# Altium PCB Thrust Stand + Wind Tunnel Controller.PcbDoc (part 2 of 2)
Units mm, origin at the board's own origin, x right, y up, seen from the top; angles counter-clockwise.
Board outline 72 x 57 mm, 4 copper layers (Top Layer, Layer 2 (GND), Layer 3 (GND/POW), Bottom Layer (SIG)), stack 0.346 mm thick; 155 components, 74 nets, 570 pads, 498 vias.
Unrouted connection lines stored in the file: 154.
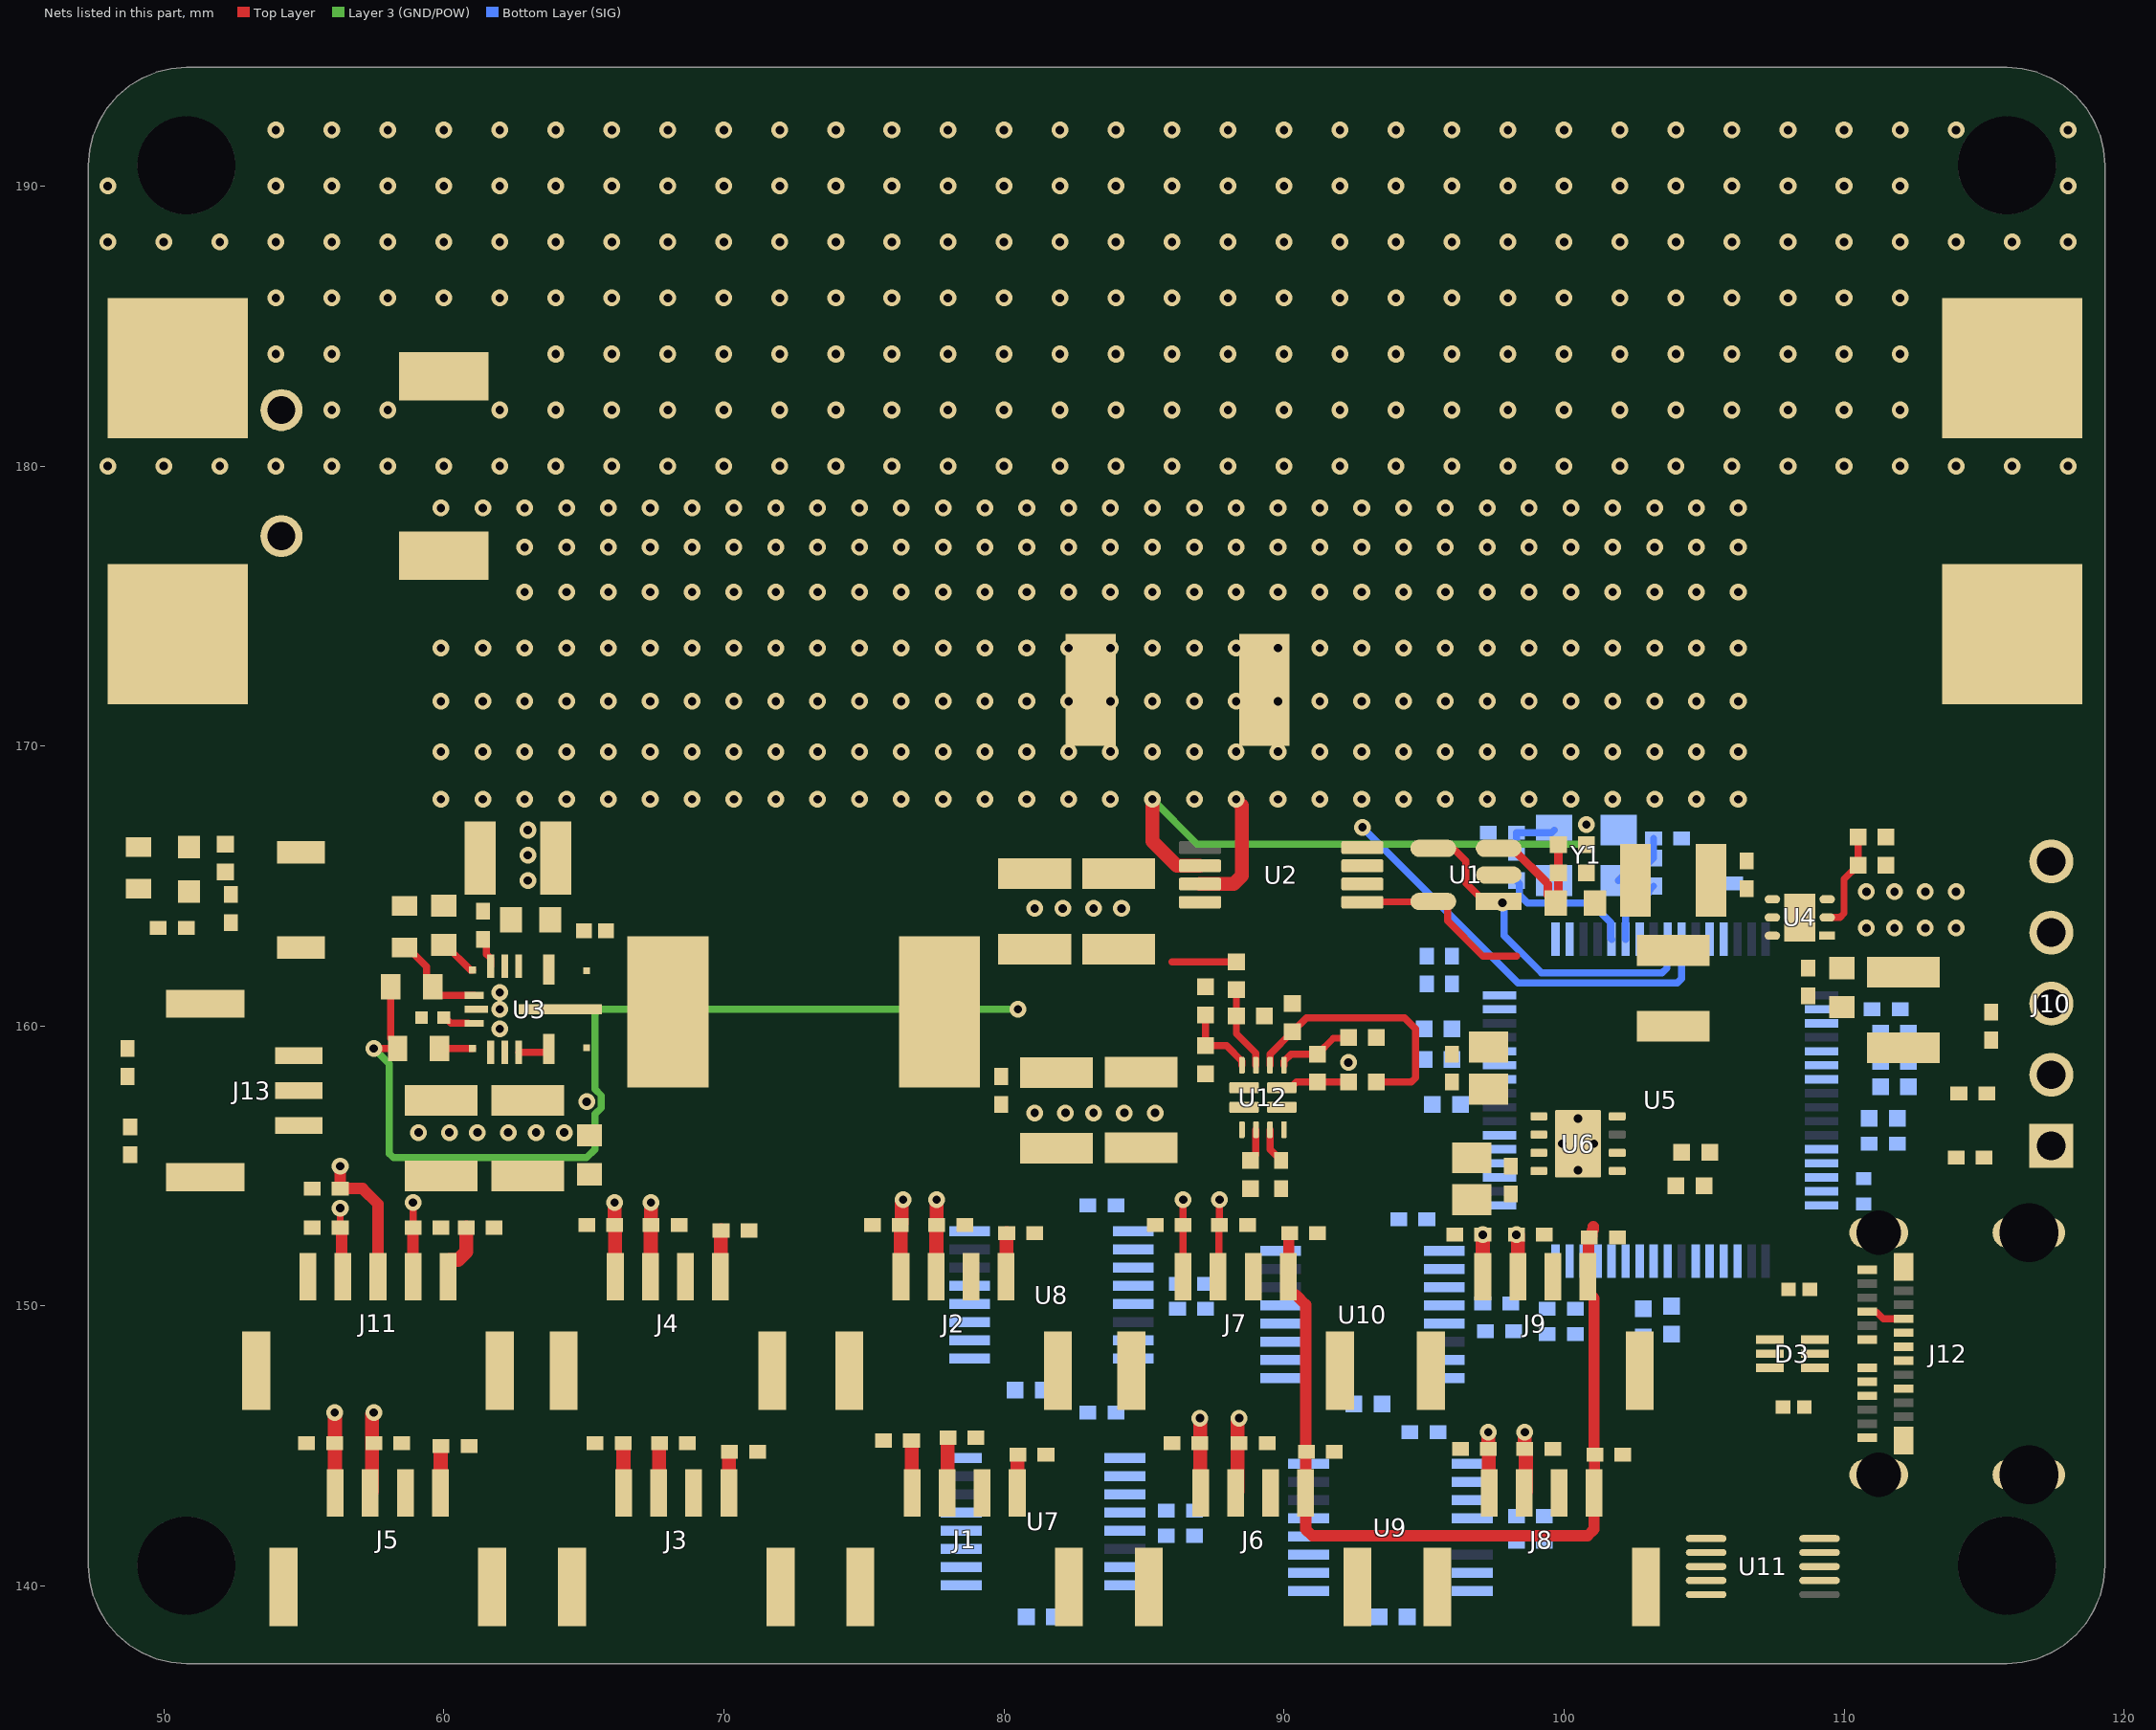
[diagram p4: the nets of this part, all layers, seen from the top]

## Part data
C1 C35 C36 C37 C38 C39 C40 C41 C42 C43 C44 C45 C46 C47 C48 C50 C51 C52 C53 C54 C55 C56 C57 C58 C59 C60 C61 C64 C65 C66 C67 C68 C69 C70 C71 C72 C73: "Capacitor (Semiconductor SIM Model)", LatestRevisionDate=29-May-2009, LatestRevisionNote="IPC-7351 Footprint Added.", PackageDescription="Chip Capacitor", PackageReference=C1206, Published=8-Jun-2000, Publisher="Altium Limited"
C4 C5 C6 C7 C9 C10 C11 C12 C13 C14 C15 C16 C17 C18 C19 C20 C21 C22 C31 C62: library part "Cap Semi", "Capacitor (Semiconductor SIM Model)", LatestRevisionDate=29-May-2009, LatestRevisionNote="IPC-7351 Footprint Added.", PackageDescription="Chip Capacitor", PackageReference=C1206, Published=8-Jun-2000, Publisher="Altium Limited"
C8: library part CMP-2000-06331-1, "Chip Capacitor, 0.1 uF, +/- 10%, 10 V, -55 to 125 degC, 0402 (1005 Metric), RoHS, Tape and Reel", Capacitance=100nF, Case Size/Dimension=0402, Dielectric=X7R, Manufacturer=Murata, Package Description="2-Pin Surface Mount Device, Body 1 x 0.5 mm", Rated Voltage=10V, Tolerance (%)=±10%, Datasheet URL=http://search.murata.co.jp/Ceramy/image/img/A01X/G101/ENG/GRM155R71A104KA01-01.pdf, Datasheet Version=02/2016, Manufacturer URL=http://www.murata.com/, Mounting Technology=SurfaceMount, Package Reference=0402
C63: library part CMP-002-000000-4, "Generic CAP 0402", Design Item ID="Generic CAP 0402", Source=Schlib1.SchLib
D1: library part CMP-02577-000023-1, "TVS DIODE 25.6VWM 41.4VC SMC"
D2: library part CMP-1426-00006-8, "LED Uni-Color Green 572nm 2-Pin Chip 0603(1608Metric) T/R", Case Code (Imperial)=0603, Case Code (Metric)=1608, Color=Green, Forward Current=100mA, Forward Voltage=2V, Manufacturer Lifecycle Status=ACTIVE, Max Junction Temperature (Tj)=95°C, Max Operating Temperature=85°C, Max Reverse Voltage (DC)=5V, Min Operating Temperature=-40°C, Power Dissipation=72mW, Test Current=20mA, Case/Package=0603, Dominant Wavelength=570nm, Height=700µm, Length=1.6mm, Lens Style="Clear, Rectangular", Lifecycle Status=Production, Luminous Intensity=40mcd, Mount="Surface Mount", Number of Pins=2, Packaging="Tape and Reel", Peak Wavelength=572nm, REACH SVHC=Unknown, Reverse Voltage=5V, RoHS=Compliant, Viewing Angle=140°, Wavelength=570nm, Width=800µm, YEOL="1 = Estimated lifetime > 10 years"
D3: library part CMP-12225-000058-1, "TVS DIODE 5.25V 17V SOT666", Breakdown Voltage=6V, Capacitance=3.5pF, Case/Package=SOT-666, Clamping Voltage=17V, Leakage Current=150nA, Max Operating Temperature=125°C, Min Operating Temperature=-40°C, Operating Supply Voltage=5V, Package Quantity=1, Peak Pulse Current=5A, Power Line Protection=Yes, Test Current=1mA, Contact Plating=Tin, Depth=1.3mm, Direction=Unidirectional, Element Configuration=Dual, ESD Protection=Yes, Height=0.6mm, Lead Free="Lead Free", Length=1.7mm, Max Breakdown Voltage=6V, Max Reverse Leakage Current=150nA, Min Breakdown Voltage=6V, Mount="Surface Mount", Number of Bidirectional Channels=2, Number of Channels=2, Number of Elements=1, Number of Pins=6, Packaging="Tape and Reel", Polarity=Unidirectional, Radiation Hardening=No, REACH SVHC="No SVHC", Reverse Breakdown Voltage=6V, Reverse Standoff Voltage=5V, Termination=SMD/SMT, Width=1.3mm, Working Voltage=5V
D4 D5 D6 D7 D8 D9 D10 D11 D12 D13 D14 D15 D16 D17 D18 D19 D20 D21: library part CMP-04989-000001-1, "HDMI2.0 ESD PROTECTION", Ambient Temperature Range High=+125°C, Ambient Temperature Range Low=-40°C, Breakdown Voltage=4.5V, Capacitance=0.9pF, Clamping Voltage=6.8V, Manufacturer="Texas Instruments", Package=DPY0002A, Peak Pulse Current=6A, Peak Pulse Power=40W, Reverse Standoff Voltage=3.6V, Temperature="-40°C to +125°C", Automotive=No, Category=Diode, ComponentLink2Description=Datasheet, ComponentLink2URL=http://www.ti.com/lit/ds/symlink/esd321.pdf, Device Class L1="Circuit Protection", Device Class L2="TVS Diodes", Device Class L3=unset, Digikey Description="HDMI2.0 ESD PROTECTION", Direction=Unidirectional, Height=0.45mm, Lead Free=Yes, Manufacturer Part Number=ESD321DPYR, Number of Channels=1, Octopart=https://octopart.com/esd321dpyr-texas+instruments-94354200, RoHS=TRUE, Standoff Height=0mm, Temperature Range High=+125°C, Temperature Range Low=-40°C
D22 D23 D24 D25 D26 D27 D28 D29: library part CMP-04989-000001-1, "TVS DIODE 5VWM 9.2VC 0402/2DFN", Ambient Temperature Range High=+125°C, Ambient Temperature Range Low=-40°C, Breakdown Voltage=4.5V, Capacitance=0.9pF, Clamping Voltage=6.8V, Manufacturer="Texas Instruments", Manufacturer Part Number=ESD321DPYR, Package=DPY0002A, Peak Pulse Current=6A, Peak Pulse Power=40W, Reverse Standoff Voltage=3.6V, Temperature="-40°C to +125°C", Automotive=No, Category=Diode, ComponentLink2Description=Datasheet, ComponentLink2URL=http://www.ti.com/lit/ds/symlink/esd321.pdf, Device Class L1="Circuit Protection", Device Class L2="TVS Diodes", Device Class L3=unset, Digikey Description="HDMI2.0 ESD PROTECTION", Direction=Unidirectional, Height=0.45mm, Lead Free=Yes, Number of Channels=1, Octopart=https://octopart.com/esd321dpyr-texas+instruments-94354200, RoHS=TRUE, Standoff Height=0mm, Temperature Range High=+125°C, Temperature Range Low=-40°C
J1 J2 J3 J4 J5 J6 J7 J8 J9: library part CMP-17439-000062-2, "CONN HEADER SMD 4POS 1.25MM", Case/Package=SMD/SMT, Current rating=1A, Housing Color=Natural, Max Operating Temperature=85°C, Min Operating Temperature=-25°C, Voltage rating=50V, Contact Material=Bronze, Contact Plating=Tin, Gender=Male, Housing Material=Nylon, Lead Free="Lead Free", Number of Contacts=4, Number of Positions=4, Number of Rows=4, Orientation=Straight, Packaging="Cut Tape", Pitch=1.25mm, REACH SVHC="No SVHC", Series=GH, Termination=Crimp, Voltage Rating (AC)=50V, Wire/Cable Gauge=26AWG
J10: library part CMP-02766-000105-1, "CONN HEADER VERT 5POS 2.54MM", Contact Material=Bronze, Contact Plating=Gold, Gender=Male, Mount="Through Hole", Number of Contacts=5, Number of Rows=1, REACH SVHC="No SVHC", Termination="Through Hole"
J11: library part CMP-17439-000467-1, "CONN HEADER SMD 5POS 1.25MM", Color=Natural, Flammability Rating="UL94 V-0", Max Operating Temperature=85°C, Min Operating Temperature=-25°C, Voltage rating=50V, Connector Type=Header, Contact Finish - Mating=TIN, Contact Material=Bronze, Contact Plating=Tin, Contact Shape=Rectangular, Contact Type="Outer Shroud Contact", Fastening Type=Ramp, Insulation Color=Natural, Insulation Material=Nylon, Lead Free="Lead Free", Mated Stacking Heights=7.3mm, Mount="Surface Mount", Number of Pins=5, Number of Positions=5, Number of Rows=1, Packaging="Cut Tape", Pitch=0.049inch, Series=GH, Termination=Solder
J12: library part CMP-04767-000004-1, "CONN RCP USB3.1 TYPEC 24P SMD RA", Current rating=0.25/1.25/5A, Manufacturer=Molex, Package=0, Temperature="-30°C to +85°C", Temperature Range High=+85°C, Temperature Range Low=-30°C, Voltage rating=30V, Automotive=No, Category=Conn, ComponentLink2Description=Datasheet, ComponentLink2URL=https://www.molex.com/webdocs/datasheets/pdf/en-us/1054500101_IO_CONNECTORS.pdf, Conn Orientation="Right Angle", Contact Material=Gold,Nickel, Device Class L1=Connectors, Device Class L2="USB Connectors", Device Class L3=unset, Digikey Description="CONN RCP USB3.1 TYPEC 24P SMD RA", Footprint Url=https://www.molex.com/pdm_docs/sd/1054500101_sd.pdf, Height=3.44mm, Is Female=yes, Lead Free=Yes, Manufacturer Part Number=1054500101, Mouser Description="USB Shielded I/O Receptacle; Type C; Right Angle; Surface Mount; Gold over Nickel", Number of Contacts=24, Octopart=https://octopart.com/105450-0101-molex-68082325, Pitch=0.5mm, RoHS=TRUE, Shielding=true, Usb Standard="USB 3.1"
J13: library part CMP-17439-000616-1, "CONN HEADER SMD 3POS 1.25MM", Color=Natural, Flammability Rating="UL94 V-0", Max Operating Temperature=85°C, Min Operating Temperature=-25°C, Voltage rating=50V, Connector Type=Header, Contact Finish - Mating=TIN, Contact Material=Bronze, Contact Plating=Tin, Contact Shape=Rectangular, Contact Type="Outer Shroud Contact", Fastening Type=Ramp, Insulation Color=Natural, Insulation Material=Nylon, Lead Free="Lead Free", Mated Stacking Heights=7.3mm, Mount="Surface Mount", Number of Positions=3, Number of Rows=1, Packaging="Cut Tape", Pitch=0.049inch, Series=GH, Termination=Solder
L1: library part CMP-2000-07146-2, "FIXED IND 15UH 5A 27 MOHM SMD", Case/Package=1260, Current rating=5A, DC Resistance (DCR)=27mR, Frequency=17.6MHz, Inductance=15uH, Inductance Tolerance=20%, Max Operating Temperature=125°C, Min Operating Temperature=-40°C, Package Quantity=600, Resistance=27MR, Resistor Type=Wirewound, Saturation Current=4.6A, Test Frequency=100kHz, Core Material=Ferrite, DC Current=5A, Depth=12.8mm, Height=6mm, Height - Seated (Max)=0.256inch, Length=12.5mm, Material=Steel, Max DC Current=5A, Military Standard=Not, Mount="Surface Mount", Number of Pins=2, Packaging="Tape and Reel", Q Factor=25, REACH SVHC="No SVHC", RMS Current (Irms)=5A, RoHS Compliant=Yes, Sample Rate (Hz)=100kHz, Self Resonant Frequency=17.6MHz, Series=SRR1260, Shielding=Shielded, Termination=SMD/SMT, Tolerance=20%, Width=12.5mm
R1 R2 R5 R6 R7 R9 R10 R11 R12 R13 R14 R15 R16 R17 R18 R24 R25 R26 R27 R28 R29 R30 R31 R32 R36 R37 R38 R39 R40 R41 R43: "Semiconductor Resistor", LatestRevisionDate=17-Jul-2002, LatestRevisionNote="Re-released for DXP Platform.", PackageReference=AXIAL-0.5, Published=8-Jun-2000, Publisher="Altium Limited"
R3: library part CMP-03412-007688-1, "RES 0.001 OHM 1% 5W 2512", Manufacturer=Yageo, Manufacturer Part Number=AC2512JK-072K4L, Package=AC2512, Power rating=1W, Resistance=1mΩ, Temperature="-55°C to +155°C", Temperature Range High=+155°C, Temperature Range Low=-55°C, Tolerance=0.05, Voltage rating=200V, Automotive=Yes, Automotive Grade="Grade 0", Category=Res, ComponentLink2Description=Datasheet, ComponentLink2URL=http://www.yageo.com/documents/recent/PYu-AC_51_RoHS_L_6.pdf, Composition="Thick Film", Device Class L1="Passive Components", Device Class L2=Resistors, Device Class L3="Chip SMD Resistors", Digikey Description="RES SMD 2.4K OHM 5% 1W 2512", Footprint Url=http://www.yageo.com/exep/pages/download/literatures/PYu-R_Mount_10.pdf, Height=0.65mm, Ipc Land Pattern Name=RESC635310X55, Lead Free=Yes, Octopart=https://octopart.com/ac2512jk-072k4l-yageo-71370358, RoHS=TRUE, Series=AC
R4: library part CMP-2002-00086-1, Manufacturer="Vishay Dale", Resistance=52.3k, Part Number=CRCW040252K3FKED
R19 R20: library part CMP-12256-000001-1, "RES 5.1 kohm, 62.5 mW, 1%, 50 V", Ambient Temperature Range High=+125°C, Ambient Temperature Range Low=-55°C, Manufacturer="Multicomp Pro", Package=MCWR04, Power rating=62.5mW, Resistance=5.1kΩ, Temperature coefficient=100ppm/°C, Tolerance=1%, Voltage rating=50V, Automotive=No, Category=Res, ComponentLink2Description=Datasheet, ComponentLink2URL=http://www.farnell.com/datasheets/2860681.pdf, Composition="Thick Film", Device Class L1="Passive Components", Device Class L2=Resistors, Device Class L3="Chip SMD Resistors", Height=0.4mm, Ipc Land Pattern Name=RESC10050X35, Lead Free=Yes, Manufacturer Part Number=MCWR04X5101FTL, Octopart=https://octopart.com/mcwr04x5101ftl-multicomp-50550258, RoHS=TRUE, Series=MCWR
R42 R44 R45 R46: "Semiconductor Resistor 1%", LatestRevisionDate=17-Jul-2002, LatestRevisionNote="Re-released for DXP Platform.", PackageReference=AXIAL-0.5, Published=8-Jun-2000, Publisher="Altium Limited"
SW1: library part CMP-2100-03586-2, "SWITCH TACTILE SPST-NO 0.05A 12V", Contact Current Rating=50mA, Contact Resistance=100mR, Insulation Resistance=100MR, Max Operating Temperature=70°C, Max Voltage Rating (DC)=12V, Min Operating Temperature=-25°C, Operating Force=1.5N, Package Quantity=1, Ratings="Dust Proof", Actuator Length=0.4mm, Actuator Type=Standard, Contact Material=Silver, Current rating=50mA, Depth=2.5mm, Electrical Life=200000Cycles, Height=1.2mm, Illumination Type=Non-Illuminated, Lead Free="Lead Free", Length=4mm, Max Current Rating=50mA, Mechanical Life=200000Cycles, Mount="Surface Mount", Orientation=Straight, Packaging="Tape and Reel", Switch Function=Off-Mom, Switch Travel=0.15mm, Termination=SMD/SMT, Throw Configuration=SPST, Voltage Rating (DC)=12V, Weight=0.000776oz, Width=3mm
U1: library part CMP-0187-00462-3, "IC OPAMP GP 1 CIRCUIT SOT23-5", Case/Package=SOT-23, Input Bias Current=1pA, Input Offset Voltage (Vos)=4.5mV, Max Operating Temperature=85°C, Max Supply Voltage=6V, Min Operating Temperature=-40°C, Min Supply Voltage=1.8V, Nominal Supply Current=100uA, Operating Supply Voltage=5.5V, Output Current=23mA, Package Quantity=1, Power Supply Rejection Ratio (PSRR)=86dB, Voltage Gain=112dB, Bandwidth=1MHz, Common Mode Rejection Ratio=60dB, Contact Plating=Tin, Gain Bandwidth Product=1MHz, Height=1.3mm, Lead Free="Lead Free", Length=3.1mm, Mount="Surface Mount", Number of Amplifiers=1, Number of Channels=1, Number of Circuits=1, Number of Elements=1, Number of Pins=5, Operating Supply Current=100uA, Output Current per Channel=23mA, Packaging="Tape and Reel", Radiation Hardening=No, REACH SVHC="No SVHC", Slew Rate=0.6V/µs, Unity Gain Bandwidth Product=1MHz, Voltage=6V, Width=1.8mm
U2: library part CMP-04895-000047-1, "IC AMP CURRENT SENSE 8-TSSOP", Ambient Temperature Range High=+125°C, Ambient Temperature Range Low=-40°C, Input Bias Current=90uA, Input Offset Voltage=0.005mV, Manufacturer="Texas Instruments", Max Junction Temp=+150°C, Max Supply Voltage=5.5V, Min Supply Voltage=2.7V, Nominal Supply Current=1.8mA, Package=PW0008A, Temperature="-40°C to +125°C", Voltage Gain=0.05V/mV, Automotive=No, Bandwidth=400kHz, Category=IC, ComponentLink2Description=Datasheet, ComponentLink2URL=http://www.ti.com/lit/ds/symlink/ina240.pdf, Device Class L1="Integrated Circuits (ICs)", Device Class L2="Linear ICs", Device Class L3=Instrumentation, Digikey Description="IC AMP CURRENT SENSE 8-TSSOP", Height=1.2mm, Ipc Land Pattern Name=SOP65P300X120-8, Lead Free=Yes, Manufacturer Part Number=INA240A2PWR, Number of Channels=1, Octopart=https://octopart.com/ina240a2pwr-texas+instruments-75431049, RoHS=TRUE, Standoff Height=0.05mm, Temperature Range High=+125°C, Temperature Range Low=-40°C
U3: "8-A buck converter optimized for power density and low EMI 16-VQFN-HR -40 to 150", Manufacturer_Name="Texas Instruments", Copyright="Copyright (C) 2026 Ultra Librarian. All rights reserved.", Manufacturer_Part_Number=LM61480RPHR, RefDes=RefDes, Type=TYPE
U4: library part CMP-04917-000172-1, "IC REG LINEAR POS ADJ 1A 6WSON"
U5: library part CMP-12105-000007-1, "IC MCU 32BIT 512KB FLASH 64LQFP", Ambient Temperature Range High=+85°C, Ambient Temperature Range Low=-40°C, Frequency=180MHz, Manufacturer=ST, Max Junction Temp=+105°C, Max Supply Voltage=3.6V, Min Supply Voltage=1.7V, Package=LQFP64-5W, Temperature="-40°C to +105°C", Automotive=No, Category=IC, ComponentLink2Description=Datasheet, ComponentLink2URL=https://www.st.com/en/microcontrollers-microprocessors/stm32f446re.html, Core Architecture="ARM Cortex-M4", Data Bus Width=32bits, Device Class L1="Integrated Circuits (ICs)", Device Class L2="Embedded Processors and Controllers", Device Class L3=Microcontrollers, Digikey Description="IC MCU 32BIT 512KB FLASH 64LQFP", Height=1.6mm, Interface=I2C,SPI,UART,USART,CAN,USB,LIN,IrDA,I2S,Other, Ipc Land Pattern Name=QFP50P1200X1200X160-64, Lead Free=Yes, Manufacturer Part Number=STM32F446RET6, Memory Size=512KBytes, Memory Type=FLASH, Mouser Description="ARM Microcontrollers - MCU High-performance and DSP with FP, ARM Cortex-M4 MCU with 512 Kbytes Flash, 180 MHz CPU, Art Accelerator, SDRAM", Number of A/D Converters=3, Number Of Adc Channels=16, Number Of Cores=1, Number Of I2C Channels=4, Number of I/Os=50, Number Of Pwm Channels=32, Number Of Spi Channels=4, Number of Timers/Counters=14, Number Of Uart Channels=6, Number Of Usb Channels=2, Octopart=https://octopart.com/stm32f446ret6-stmicroelectronics-52642920, RAM Size=128KBytes, RoHS=TRUE, Standoff Height=0.05mm, Temperature Range High=+105°C, Temperature Range Low=-40°C
U6: library part CMP-0395-00646-2, "Single Output High PSRR LDO, 500 mA, Adjustable 1.2 to 5.5 V Output, 2.7 to 5.5 V Input, 8-pin SON (DRB), -40 to 125 degC, Green (RoHS & no Sb/Br)", Manufacturer="Texas Instruments", Rating=Automotive, Accuracy(%)=2, ComponentLink1Description="Manufacturer URL", ComponentLink1URL=http://www.ti.com/, ComponentLink2Description=Datasheet, ComponentLink2URL=http://www.ti.com/general/docs/lit/getliterature.tsp?genericPartNumber=TPS79501-Q1&fileType=pdf, ComponentLink3Description="Package Specification", ComponentLink3URL=http://www.ti.com/litv/pdf/mpds118h, DatasheetVersion=SLVSAJ9, Eco-Plan="Green (RoHS & no Sb/Br)", Iout(Max)(A)=0.5, Iq(Typ)(mA)=0.26, Mounting Technology="Surface Mount", PackageDescription="8-Pin Plastic Small Outline, Body 3 x 3 mm, Pitch 0.65 mm", PackageReference=DRB0008B, PackageVersion=4203482-2/K, PartNumber=TPS79501QDRBRQ1, SubFamily="Single Channel LDO", Vdo(Typ)(mV)=110, Vin(Max)(V)=5.5, Vin(Min)(V)=2.7, Vout Adj(Max)(V)=5.5, Vout Adj(Min)(V)=1.2
U7 U8 U9 U10: "24-bit, 2-kSPS, four-channel, low-power, delta-sigma ADC with PGA, VREF, SPI and two IDACs 16-TSSOP -40 to 125", Manufacturer_Name="Texas Instruments", Copyright="Copyright (C) 2025 Ultra Librarian. All rights reserved.", Manufacturer_Part_Number=ADS1220IPW, RefDes=RefDes, Type=Type
U11: library part CMP-010-000001-1, Design Item ID=CH340E, Source=Schlib1.SchLib
U12: library part CMP-04910-000009-1, "PWR MGMT BATTERY MGMT", Manufacturer="Texas Instruments", Max Junction Temp=+125°C, Max Supply Voltage=22V, Min Supply Voltage=2.8V, Nominal Supply Current=300uA, Output Current=1.5-5.2A, Package=RUX0012A, Temperature="-40°C to +125°C", Temperature Range Low=-40°C, Automotive=No, Category=IC, ComponentLink2Description=Datasheet, ComponentLink2URL=https://www.ti.com/lit/ds/symlink/tps2121.pdf, Device Class L1="Integrated Circuits (ICs)", Device Class L2="Power Management ICs", Device Class L3=unset, Digikey Description="PWR MGMT BATTERY MGMT", Height=1mm, Lead Free=Yes, Manufacturer Part Number=TPS2121RUXR, Mouser Description="2.7-22V, 56m?, 4.5A, Priority Power MUX with Seamless Switchover 12-VQFN-HR -40 to 125", Number of Outputs=1, Octopart=https://octopart.com/tps2121ruxr-texas+instruments-95511053, Output Voltage=22V, RoHS=TRUE, Standoff Height=0mm, Temperature Range High=+125°C
Y1: "8 MHz Â±20ppm Crystal 12pF 400 Ohms 4-SMD, No Lead", Package="ECX-32-33-4 ECS", Check_prices=https://www.snapeda.com/parts/ECS-80-12-33-JGN-TR/ECS/view-part/?ref=eda, MF="ECS Inc.", MP=ECS-80-12-33-JGN-TR, SnapEDA_Link=https://www.snapeda.com/parts/ECS-80-12-33-JGN-TR/ECS/view-part/?ref=snap

## Free pads (board coordinates)
  rect 5x5 smd: 1(50.5,174) 2(50.5,183.5) 3(116,183.5) 4(116,174)
  round 3.5 hole 3.5: 1(50.812,140.735) 1(50.812,190.735) 1(115.812,140.735) 1(115.812,190.735)
  round 1.5 hole 1: 5(54.2,182) 6(54.2,177.5)

## Via types
v1: diameter 0.6, hole 0.3, Top Layer to Bottom Layer (SIG), tented both sides, 273 vias
v2: diameter 0.6, hole 0.3, Top Layer to Bottom Layer (SIG), 221 vias
v3: diameter 0.5, hole 0.3, Top Layer to Bottom Layer (SIG), tented both sides, 4 vias

## Nets (pads, with @x,y where several pads share a name; then routed paths per layer and width w, separated by ;. In a path a pad name is that pad's centre, name@x,y a point inside that pad or via, vN(x,y) a via of type N, cw(c..) or ccw(c..) an arc to the next point about the centre after c; other vN are vias at no path point)
3V3: C17.1 C18.2 C20.1 C39.1 C40.1 C41.1 C42.1 C43.1 C44.1 C45.1 C46.1 C47.1 C52.1 C53.1 C54.1 C55.1 C56.1 C57.1 C63.2 C68.1 C69.1 C70.1 C71.1 C72.1 C73.1 J1.1 J2.1 J3.1 J4.1 J5.1 J10.4 J11.1 R9.2 R13.2 R14.2 R15.2 R16.2 R17.2 R18.2 R38.2 R39.2 R40.2 R41.2 R42.2 R43.1 U4.1 U5.1 U5.13 U5.19 U5.32 U5.48 U5.64 U7.12 U7.13 U8.12 U8.13 U9.12 U9.13 U10.12 U10.13 U11.7 U11.10 | length 10
  Top Layer w0.5: J5.1@59.875,143.325 59.888,143.338 59.888,144.988 C70.1@59.9,145 ; J11.1@60.15,151.05 60.15,151.6 60.2,151.65 60.507,151.65 60.8,151.943 C69.1@60.8,152.8 ; J4.1@69.875,151.05 69.888,151.062 69.888,152.688 C73.1@69.9,152.7 ; J3.1@70.175,143.325 70.188,143.338 70.188,144.788 C72.1@70.2,144.8 ; J2.1@80.075,151.05 80.088,151.062 80.088,152.588 C71.1@80.1,152.6 ; J1.1@80.475,143.325 80.487,143.337 80.487,144.688 C68.1@80.5,144.7
  other v1: 110.8,163.5 111.8,163.5 112.9,163.5 114,163.5 110.8,164.8 111.8,164.8 112.9,164.8 114,164.8
4V3: C37.2 C38.2 C58.1 C59.1 C60.1 C61.1 C64.1 C65.1 C66.1 C67.1 J6.1 J7.1 J8.1 J9.1 R11.2 U6.3 U6.4 U7.9 U8.9 U9.9 U10.9 | length 32.4
  Top Layer w0.4: C66.1@90.2,152.6 90.175,152.575 90.175,151.075 J7.1@90.15,151.05 90.15,150.5 90.25,150.4 90.426,150.4 90.775,150.051 90.775,144.8 90.775,142.034 91.009,141.8 100.841,141.8 101.075,142.034 101.075,143.875 101.087,143.887 101.087,144.688 101.075,144.7 101.075,150.275 100.95,150.4 100.95,150.95 J9.1@100.85,151.05 100.878,151.078 100.878,152.422 C67.1@100.906,152.45 ; C67.1@100.956,152.45 101.006,152.5 101.006,152.697 101.043,152.734 101.043,152.843
5V: C15.2 C16.1 C19.1 C35.2 C36.2 U1.5 U2.5 U4.4 U4.6 U6.1 U6.2 U6.8 U12.1 U12.8 | length 6.6
  Top Layer w0.254: U2.5@92.8,164.425 92.812,164.437 95.321,164.437 U1.5@95.334,164.45 95.672,164.45 95.84,164.282 95.84,163.76 97.1,162.5 98.3,162.5
5V_BUCK: C10.1 C11.1 C12.1 C13.1 C14.1 C22.1 L1.2 R5.1 R6.2 R24.2 R26.2 U3.5 U12.7 | length 38.2
  Top Layer w0.254: v1(57.5,159.2) R5.1@58.35,159.2 58.35,159.3 58.1,159.55 R6.2@58.1,161.4 ; C10.1@61.4,163.1 61.523,162.977 61.523,162.574 61.675,162.422 U3.5@61.675,162.138 ; 86,162.3 R24.2@88.3,162.3
  Layer 3 (GND/POW) w0.254: v1(57.5,159.2) 58.049,158.651 58.049,155.449 58.198,155.3 65.1,155.3 65.4,155.6 65.4,156.855 65.627,157.082 65.627,157.518 65.4,157.745 65.4,160.451 65.549,160.6 v1(80.5,160.6)
5V_USB: D3.5 J12.A4 J12.A9 J12.B4 J12.B9 R28.2 R30.2 U12.2 | length 3.9
  Top Layer w0.254: U12.2@89.925,157.8 90.25,157.8 90.45,158 R30.2@91.2,158 R28.2@92.3,158 ; J12.A9@110.83,149.8 110.853,149.777 111.174,149.777 111.401,149.55 J12.B4@112.13,149.55
  other v1: 92.3,158.7
\: D21.1 J13.2 U5.54
BATT_CURRENT: U2.8 U5.10 | length 15.2
  Bottom Layer (SIG) w0.254: v1(92.8,167.1) 98.354,161.546 104.046,161.546 104.2,161.7 U5.10@104.2,163.1
BATT_IN: C4.1 C5.1 C6.1 C7.1 C21.1 D1.1 pad.1@50.5,174 pad.6 R1.2 R3.1 U2.2 U3.2 U3.13 U3.14 | length 21
  Top Layer w0.254: U3.13@62.675,159.062 63.677,159.062 63.75,159.135 U3.14@63.75,159.187
  Top Layer w0.5: v1@85.3,168.098 85.3,166.6 86.175,165.725 U2.2@87,165.725
  Layer 3 (GND/POW) w0.254: v1(85.3,168.1) 86.9,166.5 100.9,166.5
  other v1: 59.1,156.2 60.2,156.2 61.2,156.2 62.3,156.2 63.3,156.2 64.3,156.2 65.1,157.3 63,165.2 63,166.1 63,167 100.8,167.2 59.9,168.1 61.394,168.1 62.888,168.1 64.382,168.1 65.876,168.1 67.371,168.1 68.865,168.1 70.359,168.1 71.853,168.1 73.347,168.1 74.841,168.1 76.335,168.1 77.829,168.1 79.324,168.1 80.818,168.1 82.312,168.1 83.806,168.1 59.9,169.8 61.394,169.8 62.888,169.8 64.382,169.8 65.876,169.8 67.371,169.8 68.865,169.8 70.359,169.8 71.853,169.8 73.347,169.8 74.841,169.8 76.335,169.8 77.829,169.8 79.324,169.8 80.818,169.8 82.312,169.8 83.806,169.8 85.3,169.8 59.9,171.6 61.394,171.6 62.888,171.6 64.382,171.6 65.876,171.6 67.371,171.6 68.865,171.6 70.359,171.6 71.853,171.6 73.347,171.6 74.841,171.6 76.335,171.6 77.829,171.6 79.324,171.6 80.818,171.6 82.312,171.6 83.806,171.6 85.3,171.6 59.9,173.5 61.394,173.5 62.888,173.5 64.382,173.5 65.876,173.5 67.371,173.5 68.865,173.5 70.359,173.5 71.853,173.5 73.347,173.5 74.841,173.5 76.335,173.5 77.829,173.5 79.324,173.5 80.818,173.5 82.312,173.5 83.806,173.5 85.3,173.5 62.888,175.5 64.382,175.5 65.876,175.5 67.371,175.5 68.865,175.5 70.359,175.5 71.853,175.5 73.347,175.5 74.841,175.5 76.335,175.5 77.829,175.5 79.324,175.5 80.818,175.5 82.312,175.5 83.806,175.5 85.3,175.5 62.888,177.1 64.382,177.1 65.876,177.1 67.371,177.1 68.865,177.1 70.359,177.1 71.853,177.1 73.347,177.1 74.841,177.1 76.335,177.1 77.829,177.1 79.324,177.1 80.818,177.1 82.312,177.1 83.806,177.1 85.3,177.1 59.9,178.5 61.394,178.5 62.888,178.5 64.382,178.5 65.876,178.5 67.371,178.5 68.865,178.5 70.359,178.5 71.853,178.5 73.347,178.5 74.841,178.5 76.335,178.5 77.829,178.5 79.324,178.5 80.818,178.5 82.312,178.5 83.806,178.5 85.3,178.5
BATT_VOLTAGE: U1.1 U1.4 U5.9 | length 12.4
  Top Layer w0.254: U1.4@95.334,166.35 95.403,166.28 96.12,166.28 96.5,165.9 96.5,165.106 97.206,164.4 v1(97.8,164.4)
  Bottom Layer (SIG) w0.254: v1(97.8,164.4) 97.866,164.334 97.866,163.234 99.2,161.9 103.5,161.9 103.677,162.077 103.677,163.077 U5.9@103.7,163.1
BL_CTS: D19.1 J11.4 U5.2 | length 2.5
  Top Layer w0.254: v1(56.3,153.5) D19.1@56.3,152.8 D19.1@56.35,152.75 ; J11.4@56.35,151.1 J11.4@56.4,151.05
  Top Layer w0.4: J11.4@56.35,151.1 D19.1@56.35,152.75
BL_RX: D18.1 J11.2 U5.52 | length 2.7
  Top Layer w0.254: D18.1@58.9,152.8 v1(58.9,153.7)
  Top Layer w0.4: J11.2@58.9,151.05 D18.1@58.9,152.8
BL_TX: D12.1 J11.3 U5.51 | length 5
  Top Layer w0.4: v1(56.3,155) D12.1@56.3,154.2 57.1,154.2 57.65,153.65 J11.3@57.65,151.05
BOOT: C8.2 U3.3 U3.4
BOOT0: U5.60
CC1: J12.A5 R19.1
CC2: J12.B5 R20.1
CH340_CTS: U5.45 U11.5
CH340_RTS: U5.44 U11.4
CH340_RXD: U5.42 U11.9
CH340_TXD: U5.43 U11.8
CP2: R30.1 R31.2 U12.3 | length 2.8
  Top Layer w0.254: U12.3@90,158.6 90,158.746 90.254,159 R30.1@91.2,159 91.768,159.568 92.268,159.568 R31.2@92.3,159.6
CS1: R38.1 U5.38 U7.2
CS2: R39.1 U5.37 U8.2
CS3: R40.1 U5.36 U9.2
CS4: R41.1 U5.35 U10.2
D_N: D3.3 J12.A7 J12.B7
D_P: D3.1 J12.A6 J12.B6
DOUT_N: D3.4 U11.2
DOUT_P: D3.6 U11.1
ESC_OUT: pad.4 R3.2 U2.3 | length 4.4
  Top Layer w0.5: U2.3@87,165.075 88.205,165.075 88.498,165.368 88.498,167.869 88.294,168.073 v1(88.294,168.1)
  other v1: 86.8,168.1 89.788,168.1 91.282,168.1 92.776,168.1 94.271,168.1 95.765,168.1 97.259,168.1 98.753,168.1 100.247,168.1 101.741,168.1 103.235,168.1 104.729,168.1 106.224,168.1 86.8,169.8 88.294,169.8 89.788,169.8 91.282,169.8 92.776,169.8 94.271,169.8 95.765,169.8 97.259,169.8 98.753,169.8 100.247,169.8 101.741,169.8 103.235,169.8 104.729,169.8 106.224,169.8 86.8,171.6 88.294,171.6 89.788,171.6 91.282,171.6 92.776,171.6 94.271,171.6 95.765,171.6 97.259,171.6 98.753,171.6 100.247,171.6 101.741,171.6 103.235,171.6 104.729,171.6 106.224,171.6 86.8,173.5 88.294,173.5 89.788,173.5 91.282,173.5 92.776,173.5 94.271,173.5 95.765,173.5 97.259,173.5 98.753,173.5 100.247,173.5 101.741,173.5 103.235,173.5 104.729,173.5 106.224,173.5 86.8,175.5 88.294,175.5 89.788,175.5 91.282,175.5 92.776,175.5 94.271,175.5 95.765,175.5 97.259,175.5 98.753,175.5 100.247,175.5 101.741,175.5 103.235,175.5 104.729,175.5 106.224,175.5 86.8,177.1 88.294,177.1 89.788,177.1 91.282,177.1 92.776,177.1 94.271,177.1 95.765,177.1 97.259,177.1 98.753,177.1 100.247,177.1 101.741,177.1 103.235,177.1 104.729,177.1 106.224,177.1 86.8,178.5 88.294,178.5 89.788,178.5 91.282,178.5 92.776,178.5 94.271,178.5 95.765,178.5 97.259,178.5 98.753,178.5 100.247,178.5 101.741,178.5 103.235,178.5 104.729,178.5 106.224,178.5
ESC_PWM: D20.1 J13.1 U5.28
FB: R6.1 R7.2 U3.7 | length 3.5
  Top Layer w0.254: R7.2@58.6,162.8 58.7,162.8 59.377,162.123 59.377,161.623 R6.1@59.6,161.4 59.6,161.323 59.823,161.1 U3.7@61.087,161.1
FB_LDO: R9.1 R10.2 U4.2 | length 3.6
  Top Layer w0.254: U4.2@109.397,163.877 109.851,163.877 110,164.026 110,165.25 R9.1@110.5,165.75 R10.2@110.5,166.75
GND: C1.1 C4.2 C5.2 C6.2 C7.2 C9.2 C10.2 C11.2 C12.2 C13.2 C14.2 C15.1 C16.2 C17.2 C18.1 C19.2 C20.2 C21.2 C22.2 C31.2 C35.1 C36.1 C37.1 C38.1 C39.2 C40.2 C41.2 C42.2 C43.2 C44.2 C45.2 C46.2 C47.2 C48.2 C50.1 C51.2 C52.2 C53.2 C54.2 C55.2 C56.2 C57.2 C58.2 C59.2 C60.2 C61.2 C62.1 C63.1 C64.2 C65.2 C66.2 C67.2 C68.2 C69.2 C70.2 C71.2 C72.2 C73.2 D1.2 D3.2 D4.2 D5.2 D6.2 D7.2 D8.2 D9.2 D10.2 D11.2 D12.2 D13.2 D14.2 D15.2 D16.2 D17.2 D18.2 D19.2 D20.2 D21.2 D22.2 D23.2 D24.2 D25.2 D26.2 D27.2 D28.2 D29.2 J1.2 J1.5 J1.6 J2.2 J2.5 J2.6 J3.2 J3.5 J3.6 J4.2 J4.5 J4.6 J5.2 J5.5 J5.6 J6.2 J6.5 J6.6 J7.2 J7.5 J7.6 J8.2 J8.5 J8.6 J9.2 J9.5 J9.6 J10.5 J11.5 J11.6 J11.7 J12.1 J12.2 J12.3 J12.4 J12.A1 J12.A12 J12.B1 J12.B12 J13.3 J13.4 J13.5 pad.2 pad.3 pad.5 R2.1 R4.2 R7.1 R10.1 R12.1 R19.2 R20.2 R25.1 R27.1 R29.1 R31.1 R32.1 SW1.2 U1.2 U2.4 U2.6 U2.7 U3.1 U3.8 U3.11 U3.12 U3.15 U4.3 U4.5 U4.7 U5.12 U5.18 U5.31 U5.47 U5.63 U6.6 U6.9 U7.3 U7.4 U7.5 U7.8 U8.3 U8.4 U8.5 U8.8 U9.3 U9.4 U9.5 U9.8 U10.3 U10.4 U10.5 U10.8 U11.3 U12.9 U12.12 Y1.2 Y1.4
  other v1: 81.1,156.9 82.2,156.9 83.2,156.9 84.3,156.9 85.4,156.9 62,159.9 62,160.6 62,161.2 81.1,164.2 82.1,164.2 83.2,164.2 84.2,164.2
  other v2: 48,180 50,180 52,180 54,180 56,180 58,180 60,180 62,180 64,180 66,180 68,180 70,180 72,180 74,180 76,180 78,180 80,180 82,180 84,180 86,180 88,180 90,180 92,180 94,180 96,180 98,180 100,180 102,180 104,180 106,180 108,180 110,180 112,180 114,180 116,180 118,180 56,182 58,182 62,182 64,182 66,182 68,182 70,182 72,182 74,182 76,182 78,182 80,182 82,182 84,182 86,182 88,182 90,182 92,182 94,182 96,182 98,182 100,182 102,182 104,182 106,182 108,182 110,182 112,182 54,184 56,184 64,184 66,184 68,184 70,184 72,184 74,184 76,184 78,184 80,184 82,184 84,184 86,184 88,184 90,184 92,184 94,184 96,184 98,184 100,184 102,184 104,184 106,184 108,184 110,184 112,184 54,186 56,186 58,186 60,186 62,186 64,186 66,186 68,186 70,186 72,186 74,186 76,186 78,186 80,186 82,186 84,186 86,186 88,186 90,186 92,186 94,186 96,186 98,186 100,186 102,186 104,186 106,186 108,186 110,186 112,186 48,188 50,188 52,188 54,188 56,188 58,188 60,188 62,188 64,188 66,188 68,188 70,188 72,188 74,188 76,188 78,188 80,188 82,188 84,188 86,188 88,188 90,188 92,188 94,188 96,188 98,188 100,188 102,188 104,188 106,188 108,188 110,188 112,188 114,188 116,188 118,188 48,190 54,190 56,190 58,190 60,190 62,190 64,190 66,190 68,190 70,190 72,190 74,190 76,190 78,190 80,190 82,190 84,190 86,190 88,190 90,190 92,190 94,190 96,190 98,190 100,190 102,190 104,190 106,190 108,190 110,190 112,190 118,190 54,192 56,192 58,192 60,192 62,192 64,192 66,192 68,192 70,192 72,192 74,192 76,192 78,192 80,192 82,192 84,192 86,192 88,192 90,192 92,192 94,192 96,192 98,192 100,192 102,192 104,192 106,192 108,192 110,192 112,192 114,192 118,192
  other v3: 100.5,154.85 99.925,155.8 101.075,155.8 100.5,156.7
LC1+: D23.1 J6.3 U7.11 | length 2.7
  Top Layer w0.5: J6.3@88.275,143.325 88.337,143.387 88.337,145.937 v1(88.4,146)
LC1-: D22.1 J6.4 U7.10 | length 2.7
  Top Layer w0.5: v1(87,146) 87.013,145.988 87.013,143.337 J6.4@87.025,143.325
LC2+: D25.1 J7.3 U8.11 | length 2.8
  Top Layer w0.254: J7.3@87.65,151.05 87.675,151.075 87.675,152.875 D25.1@87.7,152.9 v1(87.7,153.8)
LC2-: D24.1 J7.4 U8.10 | length 2.7
  Top Layer w0.254: J7.4@86.4,151.05 D24.1@86.4,152.9 v1(86.4,153.8)
LC3+: D27.1 J8.3 U9.11 | length 2.2
  Top Layer w0.5: J8.3@98.575,143.325 98.637,143.387 98.637,144.9 D27.1@98.6,144.9 v1(98.6,145.5)
LC3-: D26.1 J8.4 U9.10 | length 2.2
  Top Layer w0.5: v1(97.3,145.5) D26.1@97.3,144.9 97.313,144.9 97.313,143.337 J8.4@97.325,143.325
LC4+: D29.1 J9.3 U10.11 | length 1.6
  Top Layer w0.5: v1(98.3,152.55) 98.35,152.55 J9.3@98.35,151.05
LC4-: D28.1 J9.4 U10.10 | length 1.5
  Top Layer w0.5: J9.4@97.1,151.05 v1(97.1,152.55)
MISO: R45.2 U7.15 U8.15 U9.15 U10.15
MOSI: R46.2 U7.16 U8.16 U9.16 U10.16
NetC1_2: C1.2 R1.1 R2.2 U1.3 | length 5.2
  Top Layer w0.3: U1.3@97.666,166.35 98.15,166.35 99.427,165.073 99.427,164.673 C1.2@99.7,164.4 99.8,164.5 R2.2@99.8,165.476 R1.1@99.8,166.476
NetC31_1: C31.1 U12.11 | length 1.3
  Top Layer w0.254: U12.11@89.5,156.3 89.5,155.6 89.727,155.373 89.777,155.373 89.9,155.25 C31.1@89.9,155.2
NetC48_1: C48.1 U5.30
NetD2_2: D2.2 R43.2
NetR4_1: R4.1 U3.9 | length 1
  Top Layer w0.254: R4.1@60.007,160.3 60.007,160.293 60.098,160.202 60.145,160.202 60.247,160.1 U3.9@60.877,160.1
NetR11_1: R11.1 R12.2 U6.5
NetR32_2: R32.2 U12.10 | length 1.2
  Top Layer w0.254: R32.2@88.8,155.2 89,155.4 U12.10@89,156.3
NetR44_1: R44.1 U5.21
NetR45_1: R45.1 U5.22
NetR46_1: R46.1 U5.23
NRST: C62.2 D2.1 D17.1 J10.3 R42.1 SW1.1 U5.7
OSC1_N: C51.1 R37.2 Y1.3 | length 2.3
  Bottom Layer (SIG) w0.254: Y1.3@101.95,165.2 102.373,165.623 102.823,165.623 R37.2@103.2,166 C51.1@103.2,166.7
OSC1_P: C50.2 R36.2 Y1.1 | length 2.1
  Bottom Layer (SIG) w0.254: R36.2@98.3,166.2 C50.2@98.3,166.9 99.55,166.9 Y1.1@99.65,167
OSC_N: R37.1 U5.6 | length 2.4
  Bottom Layer (SIG) w0.254: U5.6@102.2,163.1 102.2,164 102.478,164.278 102.549,164.278 103.027,164.756 103.027,164.827 R37.1@103.2,165
OSC_P: R36.1 U5.5 | length 4.8
  Bottom Layer (SIG) w0.254: R36.1@98.3,165.2 98.414,165.086 98.414,164.683 98.697,164.4 100.971,164.4 101.677,163.694 101.677,163.123 U5.5@101.7,163.1
OV1: R24.1 R25.2 U12.5 | length 3
  Top Layer w0.254: R24.1@88.3,161.3 R25.2@88.3,160.357 88.3,159.724 89,159.024 U12.5@89,158.6
OV2: R28.1 R29.2 U12.4 | length 9.5
  Top Layer w0.254: U12.4@89.5,158.6 89.5,159 R29.2@90.3,159.8 90.8,160.3 94.3,160.3 94.7,159.9 94.7,158.149 94.551,158 R28.1@93.3,158
PR1: R26.1 R27.2 U12.6 | length 2.8
  Top Layer w0.254: R27.2@87.2,160.4 R26.1@87.2,159.3 87.946,159.3 88.5,158.746 U12.6@88.5,158.6
RST: R5.2 U3.10 | length 1.2
  Top Layer w0.254: R5.2@59.85,159.2 U3.10@61.025,159.2
SCK: R44.2
SCL1: D9.1 D10.1 D11.1 J1.4 J2.4 J3.4 R14.1 U5.58 | length 6.5
  Top Layer w0.5: D9.1@66.4,145.1 66.413,145.087 66.413,143.337 J3.4@66.425,143.325 ; J2.4@76.325,151.05 76.313,151.062 76.313,152.887 D11.1@76.3,152.9 76.35,152.95 76.35,153.75 v1(76.4,153.8) ; D10.1@76.7,145.2 76.713,145.187 76.713,143.337 J1.4@76.725,143.325
SCL2: D13.1 J4.4 R16.1 U5.29 | length 2.7
  Top Layer w0.5: v1(66.1,153.7) D13.1@66.1,152.9 66.113,152.9 66.113,151.062 J4.4@66.125,151.05
SCL3: D14.1 J5.4 R18.1 U5.41 | length 2.9
  Top Layer w0.5: v1(56.1,146.2) 56.113,146.187 56.113,143.337 J5.4@56.125,143.325
SCLK: D16.1 J10.2 U5.49 U7.1 U8.1 U9.1 U10.1
SDA1: D4.1 D5.1 D6.1 J1.3 J2.3 J3.3 R13.1 U5.59 | length 6.4
  Top Layer w0.5: J3.3@67.675,143.325 67.688,143.338 67.688,145.088 D6.1@67.7,145.1 ; J2.3@77.575,151.05 77.588,151.062 77.588,152.887 D5.1@77.6,152.9 v1(77.6,153.8) ; J1.3@77.975,143.325 77.988,143.338 77.988,145.187 D4.1@78,145.2
SDA2: D7.1 J4.3 R15.1 U5.53 | length 2.7
  Top Layer w0.5: J4.3@67.375,151.05 67.388,151.062 67.388,152.9 D7.1@67.4,152.9 v1(67.4,153.7)
SDA3: D8.1 J5.3 R17.1 U5.40 | length 2.9
  Top Layer w0.5: J5.3@57.375,143.325 57.438,143.387 57.438,146.138 v1(57.5,146.2)
SW: C8.1 L1.1 U3.16
SWDIO: D15.1 J10.1 U5.46
VCC: C9.1 U3.6 | length 1.4
  Top Layer w0.254: C9.1@60,162.9 60.05,162.9 60.95,162 U3.6@61.025,162
pads on no net: J12.A2 J12.A3 J12.A8 J12.A10 J12.A11 J12.B2 J12.B3 J12.B8 J12.B10 J12.B11 U2.1 U5.3 U5.4 U5.8 U5.11 U5.14 U5.15 U5.16 U5.17 U5.20 U5.24 U5.25 U5.26 U5.27 U5.33 U5.34 U5.39 U5.50 U5.55 U5.56 U5.57 U5.61 U5.62 U6.7 U7.6 U7.7 U7.14 U8.6 U8.7 U8.14 U9.6 U9.7 U9.14 U10.6 U10.7 U10.14 U11.6

## Polygon pours and split planes (outlines as drawn)
5V on Top Layer "NONET_L-01_P-001" (solid, pour order 23): 103.516,163.268 98.579,163.268 98.143,162.832 98.143,158.469 99.467,158.469 99.533,161.731 99.965,162.153 103.516,162.153
5V on Top Layer "NONET_L-01_P-001" (solid, pour order 1): 87.938,157.274 87.938,156.898 98.735,156.938 98.735,155.91 99.465,155.91 99.465,158.365 99.465,158.49 95.65,158.49 95.65,157.65 95.343,157.341
3V3 on Top Layer "NONET_L-01_P-001" (solid, pour order 9): 114.5,163.562 114.5,166.15 111.1,166.15 111.1,165.35 110.25,165.35 110.25,163.562
GND on Top Layer "NONET_L-01_P-001" (solid, remove dead copper, pour order 27): 43.994,197.1 44.194,196.9 121.294,196.9 121.294,135.8 120.994,135.5 44.294,135.5
4V3 on Top Layer "NONET_L-01_P-001" (solid, pour order 26): 99.496,155.6 99.465,155.631 98.5,155.631 98.5,155.85 92.2,155.85 92.2,154.671 99.092,154.671 99.499,154.671
5V_BUCK on Top Layer "NONET_L-01_P-001" (solid, pour order 20): 86.191,158.9 86.501,158.598 87.501,158.598 87.501,158.567 88.069,158 89.101,158 89.101,157.631 89.071,157.601 86.397,157.601 86.191,157.807
3V3 on Top Layer "NONET_L-01_P-001" (solid, pour order 24): 109.119,163.562 109.119,163.027 108.469,162.377 108.469,161.777 109.386,161.777 109.486,161.677 110.543,161.677 110.843,161.377 114.5,161.377 114.5,163.562
5V on Top Layer "NONET_L-01_P-001" (solid, pour order 22): 107.802,163.05 107.215,163.05 106.126,163.057 106.1,163.057 106.1,162.143 103.516,162.143 103.516,163.265 104.067,163.265 104.666,163.864 104.666,166.48 105.766,166.48 105.766,165.165 106.636,165.165 107.784,165.165
5V_BUCK on Top Layer "NONET_L-01_P-001" (solid, pour order 18): 76.25,163.3 86.189,163.3 86.189,157.809 76.25,157.809
SW on Top Layer "NONET_L-01_P-001" (solid, pour order 17): 62.676,160.775 62.676,160.422 65.654,160.422 66.55,160.422 66.55,157.81 66.56,157.8 69.45,157.8 69.45,163.2 66.55,163.2 66.55,160.774
BATT_IN on Top Layer "Top Layer-BATT_IN" (solid, pour order 16): 62.6,164.7 62.601,164.699 63.4,164.699 63.4,161.475 63.95,161.475 63.95,162.55 64.55,163.15 64.55,167.6 62.6,167.6
BATT_IN on Top Layer "NONET_L-01_P-001" (solid, pour order 15): 63.55,159.724 63.95,159.724 63.95,157.916 63.934,157.9 65.75,157.9 65.75,155.708 58.6,155.708 58.6,157.9 63.547,157.9
ESC_OUT on Top Layer "NONET_L-01_P-001" (solid, remove dead copper, pour order 13): 86.208,179.3 86.208,167.6 121.8,167.6 121.8,167.9 121.8,179.3
BATT_IN on Top Layer "NONET_L-01_P-001" (solid, remove dead copper, pour order 14): 45.5,179.3 86.1,179.3 86.1,167.6 45.5,167.6
GND on Layer 2 (GND) "NONET_L-01_P-001" (solid, remove dead copper, pour order 3): 43.2,196.8 125.6,196.8 124.3,195.5 124.3,134.1 43.9,134.1 43.6,134.4
BATT_IN on Layer 3 (GND/POW) "NONET_L-01_P-001" (solid, pour order 4): 65.1,167.6 58.2,167.6 58.2,155.5 65.1,155.5
ESC_OUT on Layer 3 (GND/POW) "NONET_L-01_P-001" (solid, pour order 6): 86.108,179.3 86.108,167.6 106.9,167.6 106.9,179.3
BATT_IN on Layer 3 (GND/POW) "NONET_L-01_P-001" (solid, pour order 5): 59.4,179.302 86.068,179.302 86.068,167.602 59.4,167.602
GND on Layer 3 (GND/POW) "NONET_L-01_P-001" (solid, pour order 12): 43.4,197.1 44.1,196.4 124.9,196.4 124.9,134.4 124.5,134 43.9,134
no net on Top Solder "NONET_L-01_P-001" (solid): 113.75,176.5 113.75,171.5 109.25,171.5 109.25,167.5 87.25,167.5 87.25,179.25 109.25,179.25 109.25,176.5
no net on Top Solder "NONET_L-01_P-001" (solid, pour order 25): 52.9,176.5 57.25,176.5 57.25,179.3 84.75,179.3 84.75,167.6 57.25,167.6 57.25,171.5 52.9,171.5
GND on Bottom Layer (SIG) "NONET_L-01_P-001" (solid, remove dead copper, pour order 28): 44.3,197.7 45,197 123.2,197 123.2,135.1 124.8,133.5 124,132.7 43.2,132.7

## Silkscreen, mask and mechanical layers (free items; w line width, h text height)
Top Overlay:
  text "-" at 48.254,185.792 h1.52
  text "-" at 117.354,185.792 h1.52
  text "+" at 48.254,176.6 h1.52
  text "+" at 117.354,176.6 h1.52
  text "BATT" at 48.004,169.254 h1.52
  text "ESC" at 114.254,169.254 h1.52

## Text inside footprints (layer, text, board x,y; h text height)
U7: Mechanical 13 "*" at 79.216,141.093 h0.5 r180; Bottom Overlay "*" at 77.907,139.797 h0.5 r180
U8: Mechanical 13 "*" at 79.516,149.193 h0.5 r180; Bottom Overlay "*" at 78.207,147.897 h0.5 r180
U9: Mechanical 13 "*" at 91.616,140.894 h0.5 r180; Bottom Overlay "*" at 90.308,139.597 h0.5 r180
U10: Mechanical 13 "*" at 90.616,148.494 h0.5 r180; Bottom Overlay "*" at 89.307,147.197 h0.5 r180